# EAGLE board NBMC_SCHEMATIC_wout_thermistor_bridge (EAGLE 6.6.0)
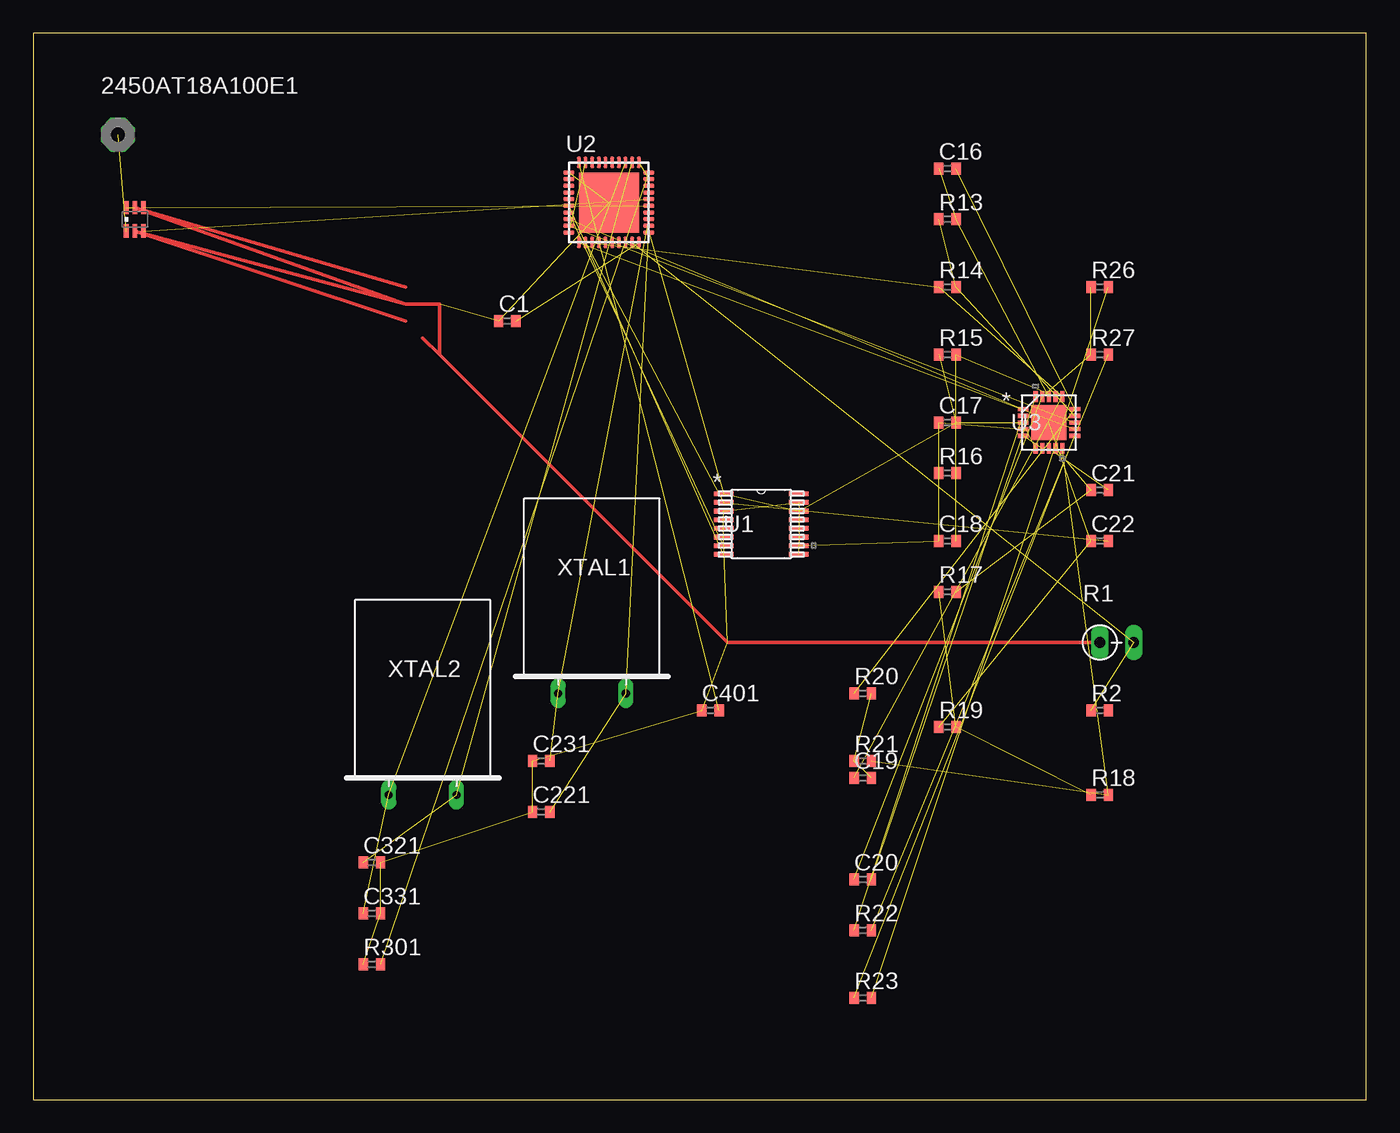
[diagram p0: board, top side]
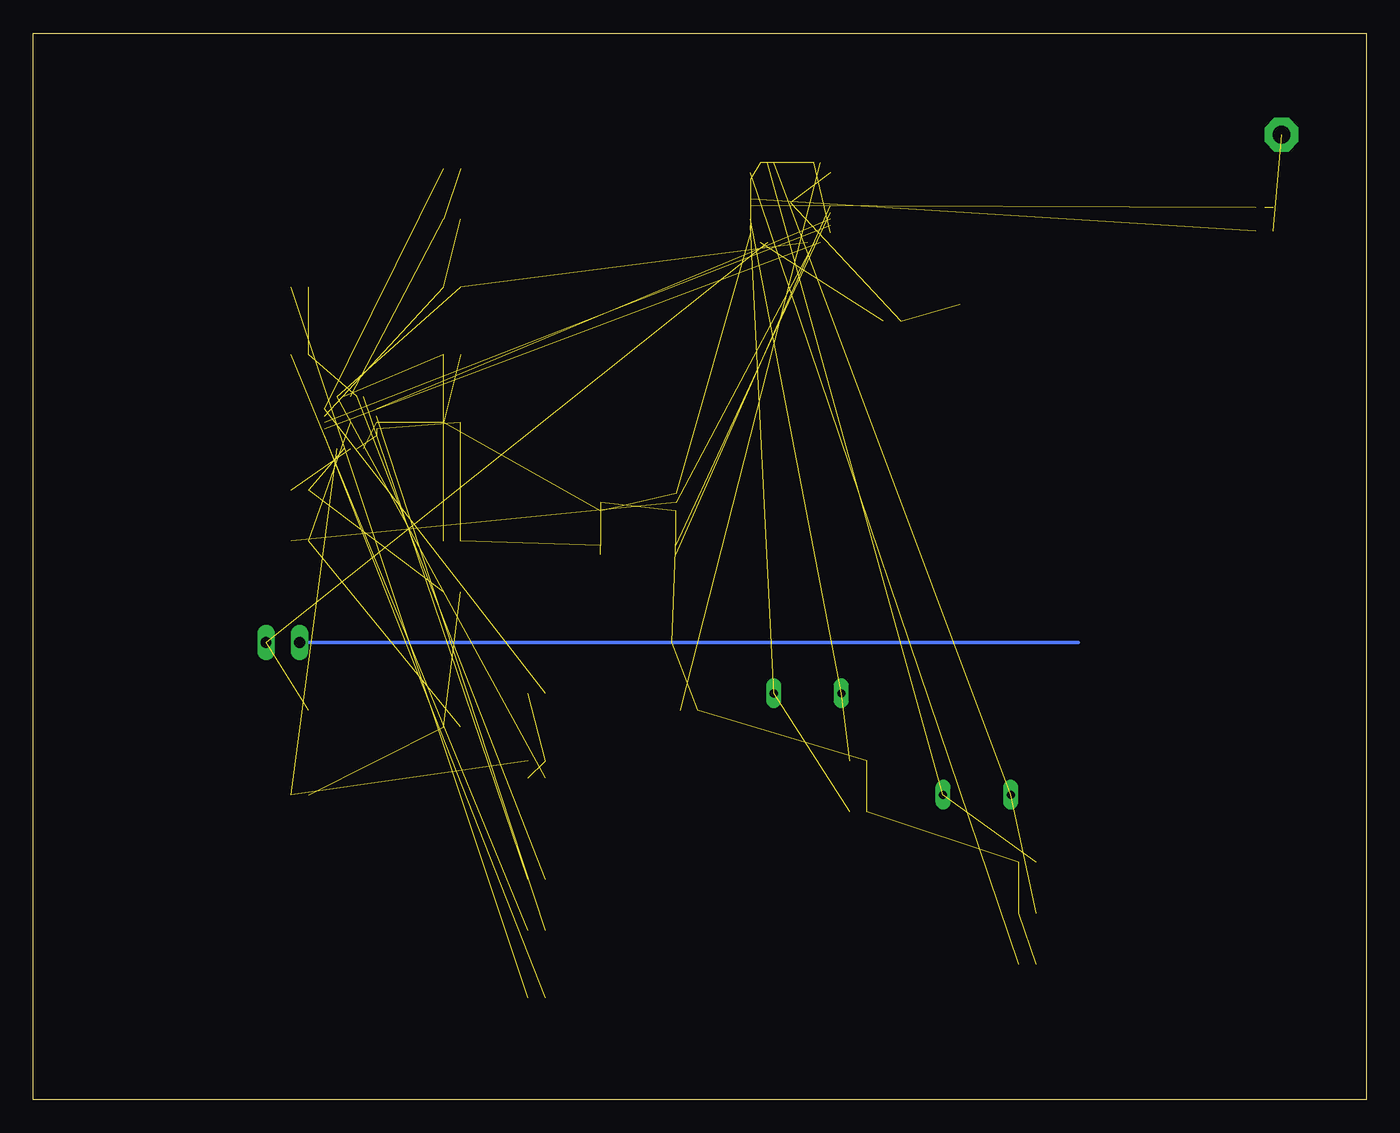
[diagram p1: board, bottom side, seen from below]

Size 100 x 80 mm. Coordinates in mm from the lower left corner, seen from the top.
Outline: 0,0 100,0 100,80 0,80 0,0
Copper layers (1*16): Top 0.035mm / dielectric 1.5mm / Bottom 0.035mm
Design rules "default": minimum track width 10mil, minimum drill 24mil, track to track 8mil, track to pad 8mil, pad to pad 8mil, via to via 8mil, smd to smd 8mil, copper to edge 40mil, drill to drill 8mil, minimum pad ring 10mil, minimum via ring 8mil, stop-mask expansion 4mil, vias tented up to drill 0mil, thermal gap 10mil

## Footprints (pad centres in the part's own frame; a part is rotated, then mirrored left to right if it is on the bottom)
PAD-01 = drill 1.321 pad 2.54 octagon: 1 0,0
C0402 = smd 0.7 x 0.9: 1 -0.65,0; 2 0.65,0
RS-2,5 = drill 0.813 long: 1 -1.27,0; 2 1.27,0
R0402 = smd 0.7 x 0.9: 1 -0.65,0; 2 0.65,0
RU_16 = smd 1.473 x 0.356: 1 -2.819,-2.275; 2 2.819,0.975; 3 -2.819,-0.975; 4 -2.819,-0.325; 5 2.819,2.275; 6 2.819,-0.325; 7 -2.819,0.325; 8 2.819,0.325; 9 2.819,-0.975; 10 -2.819,1.625; 11 2.819,-1.625; 12 2.819,1.625; 13 -2.819,0.975; 14 -2.819,2.275; 15 2.819,-2.275; 16 -2.819,-1.625
RHA_S-PVQFN-N40 = smd 0.85 x 0.3: 1 -3,2.25; 2 -3,1.75; 3 -3,1.25; 4 -3,0.75; 5 -3,0.25; 6 -3,-0.25; 7 -3,-0.75; 8 -3,-1.25; 9 -3,-1.75; 10 -3,-2.25; 21 3,-2.25; 22 3,-1.75; 23 3,-1.25; 24 3,-0.75; 25 3,-0.25; 26 3,0.25; 27 3,0.75; 28 3,1.25; 29 3,1.75; 30 3,2.25 | smd 0.3 x 0.85: 11 -2.25,-3; 12 -1.75,-3; 13 -1.25,-3; 14 -0.75,-3; 15 -0.25,-3; 16 0.25,-3; 17 0.75,-3; 18 1.25,-3; 19 1.75,-3; 20 2.25,-3; 31 2.25,3; 32 1.75,3; 33 1.25,3; 34 0.75,3; 35 0.25,3; 36 -0.25,3; 37 -0.75,3; 38 -1.25,3; 39 -1.75,3; 40 -2.25,3 | smd 4.5 x 4.5: EXP 0,0
CP_20_10 = smd 0.305 x 0.813: 1 0,-1.943; 4 -1,1.943; 5 -0.5,1.943; 8 0,1.943; 10 1,1.943; 15 -1,-1.943; 16 -0.5,-1.943; 18 0.5,1.943; 19 1,-1.943; 20 0.5,-1.943 | smd 0.813 x 0.305: 2 -1.943,0.5; 3 1.943,-1; 7 1.943,1; 9 1.943,0.5; 11 1.943,-0.5; 12 1.943,0; 13 -1.943,1; 14 -1.943,-0.5; 17 -1.943,0; 21 -1.943,-1 | smd 2.642 x 2.642: 6 0,0
2450BM15A0002 = smd 0.35 x 1: 1 -0.65,-0.875; 2 0,-0.875; 3 0.65,-0.875; 4 0.65,0.875; 5 0,0.875; 6 -0.65,0.875
Q = drill 0.61 long: 1 -2.54,-7.62; 2 2.54,-7.62

## Placement (x,y rotation side)
2450AT18A100E1  Ant Chip  [PAD-01]  6.35,72.39 0 top
C1  1µF  [C0402]  35.56,58.42 0 top
C16  10nF  [C0402]  68.58,69.85 0 top
C17  0.1µF  [C0402]  68.58,50.8 0 top
C18  0.1µF  [C0402]  68.58,41.91 0 top
C19  1.5nF  [C0402]  62.23,24.13 0 top
C20  1nF  [C0402]  62.23,16.51 0 top
C21  0.33µF  [C0402]  80.01,45.72 0 top
C22  0.33µF  [C0402]  80.01,41.91 0 top
C221  12pF  [C0402]  38.1,21.59 0 top
C231  12pF  [C0402]  38.1,25.4 0 top
C321  15pF  [C0402]  25.4,17.78 0 top
C331  15pF  [C0402]  25.4,13.97 0 top
C401  1µF  [C0402]  50.8,29.21 0 top
R1  THERMISTOR-2,5  [RS-2,5]  81.28,34.29 0 top
R2  0Ω  [R0402]  80.01,29.21 0 top
R13  100kΩ  [R0402]  68.58,66.04 0 top
R14  1MΩ  [R0402]  68.58,60.96 0 top
R15  10MΩ  [R0402]  68.58,55.88 0 top
R16  10MΩ  [R0402]  68.58,46.99 0 top
R17  10MΩ  [R0402]  68.58,38.1 0 top
R18  10MΩ  [R0402]  80.01,22.86 0 top
R19  1.4MΩ  [R0402]  68.58,27.94 0 top
R20  1MΩ  [R0402]  62.23,30.48 0 top
R21  1MΩ  [R0402]  62.23,25.4 0 top
R22  180kΩ  [R0402]  62.23,12.7 0 top
R23  180kΩ  [R0402]  62.23,7.62 0 top
R26  10MΩ  [R0402]  80.01,60.96 0 top
R27  10MΩ  [R0402]  80.01,55.88 0 top
R301  56KΩ  [R0402]  25.4,10.16 0 top
U1  ADG709BRU  [RU_16]  54.61,43.18 0 top
U2  CC2541  [RHA_S-PVQFN-N40]  43.18,67.31 0 top
U3  AD8232ACPZ_R7  [CP_20_10]  76.2,50.8 0 top
U4  2450BM15A0002  [2450BM15A0002]  7.62,66.04 0 top
XTAL1  32MHz  [Q]  41.91,38.1 0 top
XTAL2  32.768kHz  [Q]  29.21,30.48 0 top

## Library data of the parts
2450AT18A100E1 = discrete
C1 C16-C22 C221 C231 C321 C331 C401 R2 R13-R23 R26 R27 R301 = rcl
R1 = varistor
U1 = ADG709
U2 = ST-CC254X
U3 = AD8232
U4 = johanson-technology
XTAL1 XTAL2 = special

## Nets
GND: C1.1 C17.1 C18.1 C221.1 C231.1 C321.2 C331.2 C401.1 R1.1 R16.1 R301.1 U1.3 U1.11 U1.12 U1.13 U1.15 U2.1 U2.EXP U3.14 U3.16 U3.21 U4.2 U4.5 U4.6
N$1: U2.26 U4.3
N$2: R301.2 U2.30
N$3: C1.2 U2.20
N$4: U2.25 U4.4
N$6: C22.2 U1.10 U2.12
N$7: 2450AT18A100E1.1 U4.1
N$8: C401.2 U2.40
N$10: R1.2 R2.1 U2.19
N$11: C221.2 U2.22 XTAL1.2
N$12: C231.2 U2.23 XTAL1.1
N$13: C321.1 U2.32 XTAL2.2
N$14: C331.1 U2.33 XTAL2.1
N$15: R22.1 U3.2
N$17: C20.1 R26.1 R27.1 U3.5
N$18: R2.2
N$19: U1.1 U2.6
N$20: U1.16 U2.7
N$21: R23.1 U3.3
N$22: C22.1 R19.1 U3.6
N$23: U1.4
N$24: U1.5
N$25: U2.11 U3.11
N$26: U2.9 U3.12
N$27: U2.8 U3.13
N$29: C19.2 R20.2 R21.1
N$30: U1.6
N$31: R22.2 R27.2
N$37: R13.1 R14.2 U3.9
N$40: R23.2 R26.2
N$41: C16.2 R20.1 U3.7
N$42: C16.1 R13.2 U3.8
N$43: C19.1 R14.1 U2.13 U3.10
N$46: C18.2 R15.2 R16.2 U3.18
N$49: R18.2 R21.2 U3.19
N$50: C21.1 R17.2 U3.20
N$51: R17.1 R18.1 R19.2
N$54: C20.2 U3.4
N$57: C21.2 U3.1
N/C: U2.4
VSS: C17.2 R15.1 U1.2 U1.14 U2.10 U2.21 U2.24 U2.27 U2.28 U2.29 U2.31 U2.39 U3.15 U3.17

## Tracks (layer width: path | path; a pad name or v marks a point on that pad's centre or on a via)
GND  (21 unrouted)
  Top 0.254: 30.48,55.88 52.07,34.29 R1.1 | 30.48,55.88 29.21,57.15 | 27.94,59.69 U4.5 27.94,60.96 | 27.94,59.69 U4.2 27.94,58.42 | 27.94,59.69 30.48,59.69 30.48,55.88
  Bottom 0.254: R1.1 21.59,34.29
N$1  (1 unrouted)
N$2  (1 unrouted)
N$3  (1 unrouted)
N$4  (1 unrouted)
N$6  (2 unrouted)
N$7  (1 unrouted)
N$8  (1 unrouted)
N$10  (2 unrouted)
N$11  (2 unrouted)
N$12  (2 unrouted)
N$13  (2 unrouted)
N$14  (2 unrouted)
N$15  (1 unrouted)
N$17  (3 unrouted)
N$19  (1 unrouted)
N$20  (1 unrouted)
N$21  (1 unrouted)
N$22  (2 unrouted)
N$25  (1 unrouted)
N$26  (1 unrouted)
N$27  (1 unrouted)
N$29  (2 unrouted)
N$31  (1 unrouted)
N$37  (2 unrouted)
N$40  (1 unrouted)
N$41  (2 unrouted)
N$42  (2 unrouted)
N$43  (3 unrouted)
N$46  (3 unrouted)
N$49  (2 unrouted)
N$50  (2 unrouted)
N$51  (2 unrouted)
N$54  (1 unrouted)
N$57  (1 unrouted)
VSS  (13 unrouted)